# EAGLE board PCB (EAGLE 9.7.0)
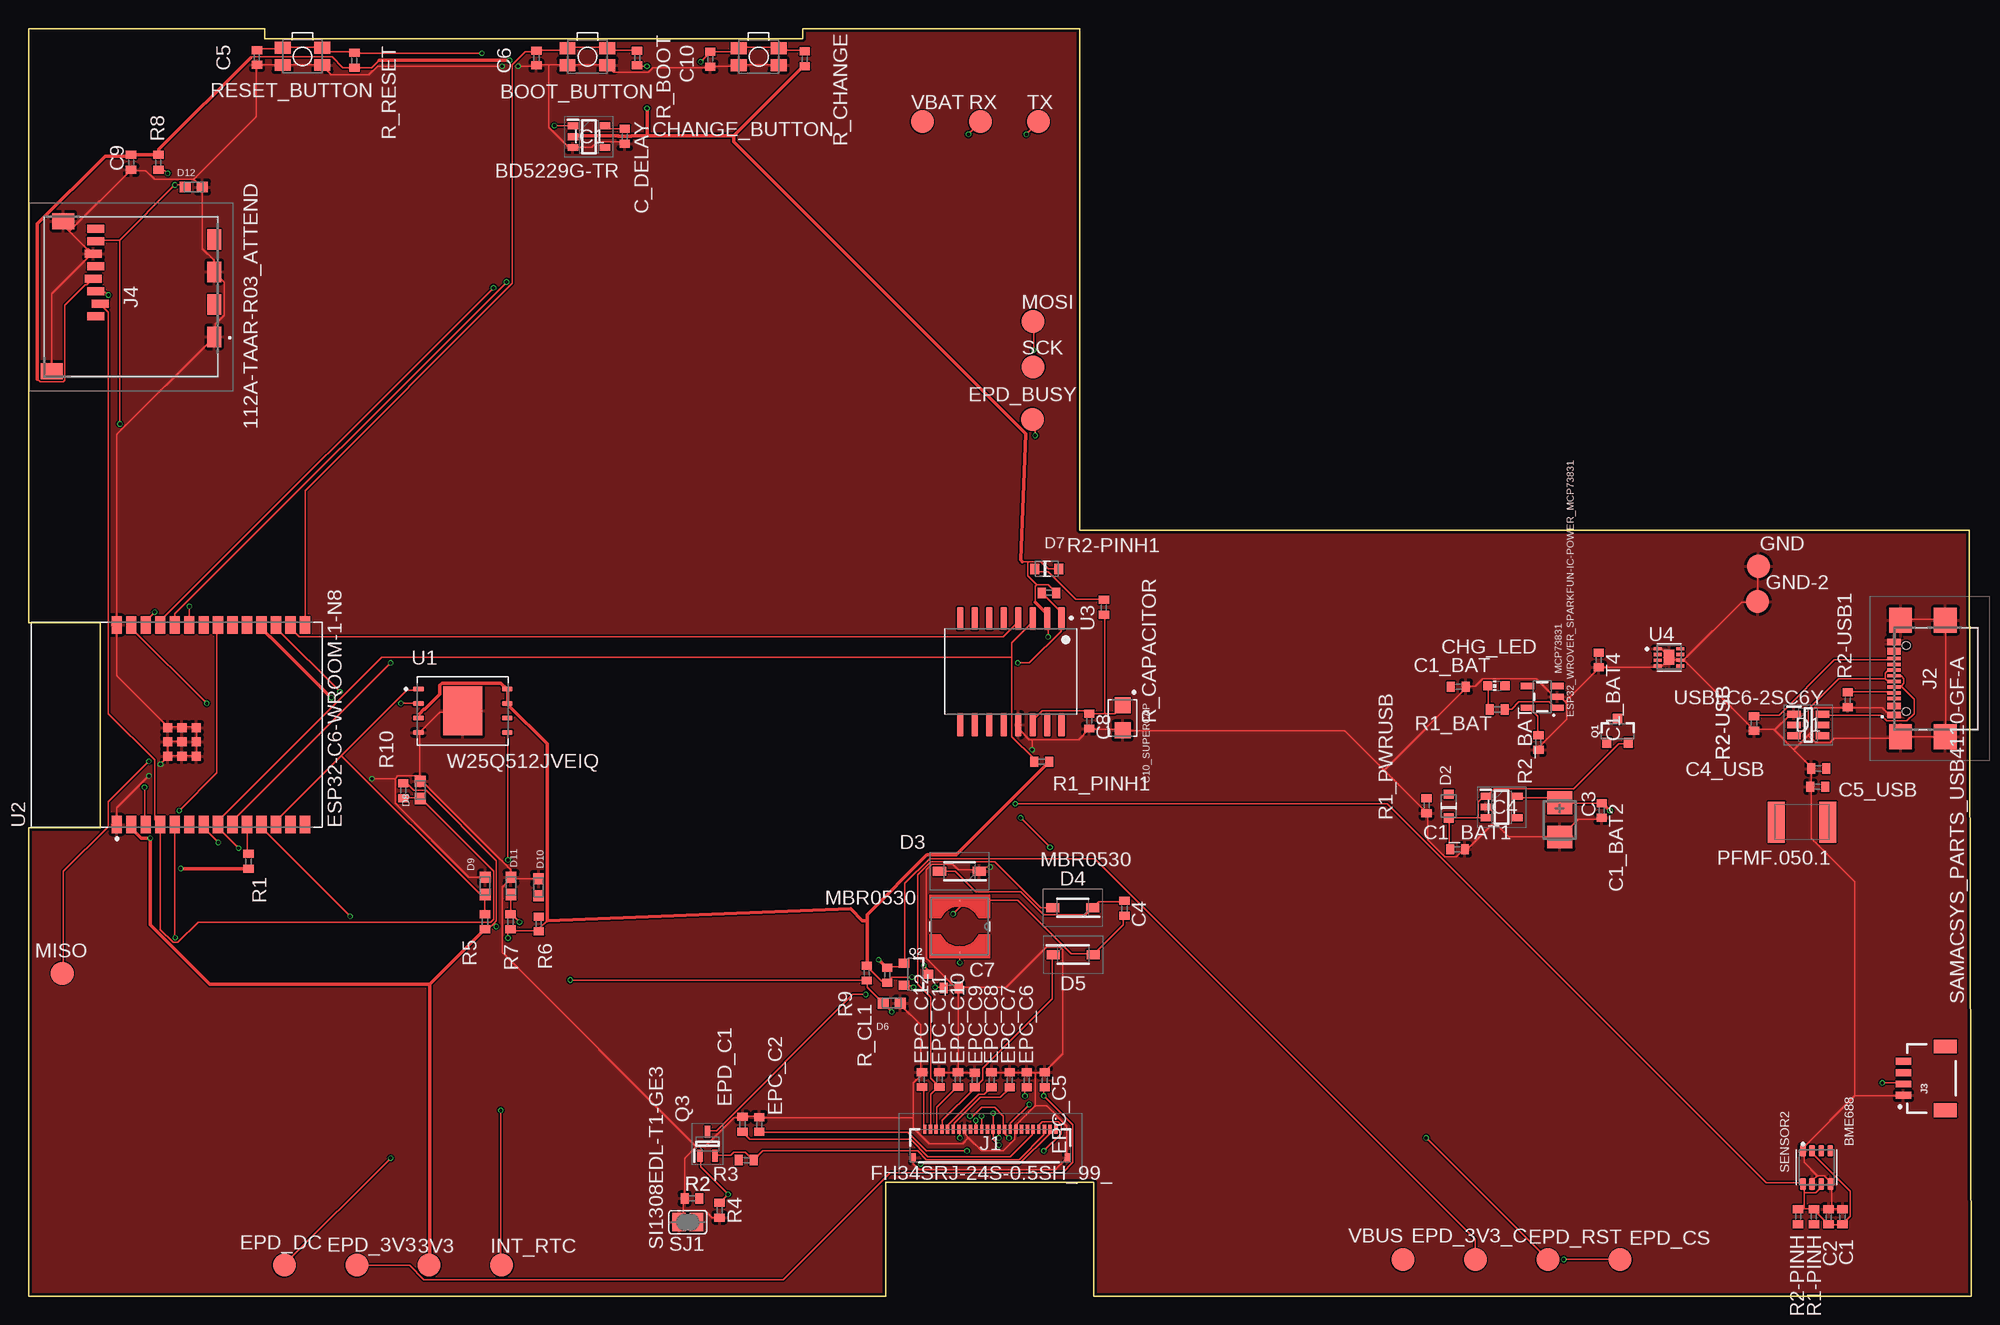
[diagram p0: board, top side]
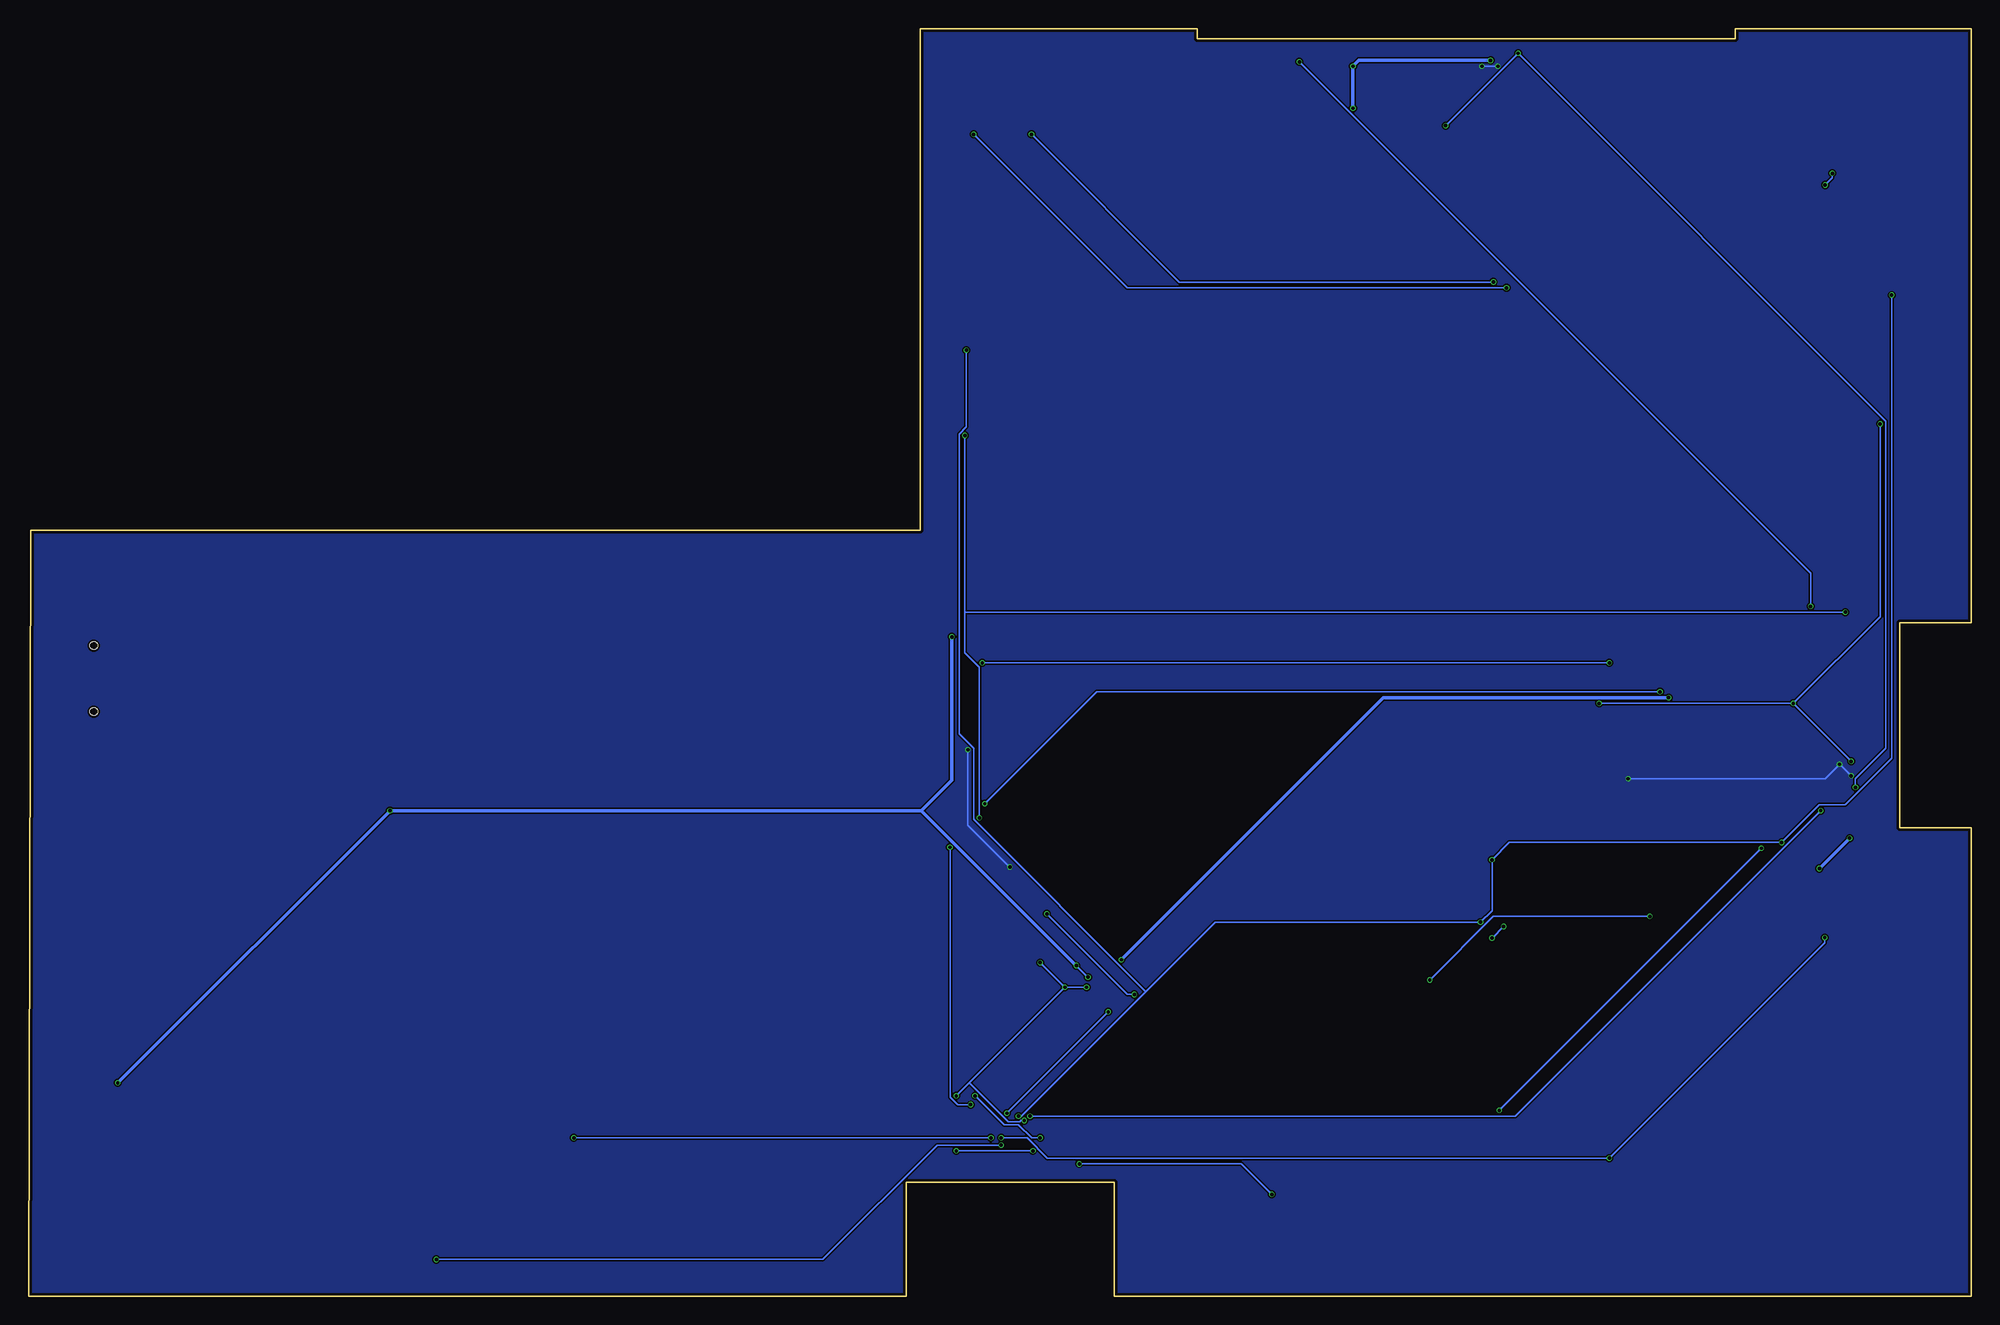
[diagram p1: board, bottom side, seen from below]

Size 170.4 x 111.2 mm. Coordinates in mm from the lower left corner, seen from the top.
Outline: 0,41.1 0,0 75.2,0 75.2,10 93.4,10 93.4,0 170.4,0 170.2,67.2 92.2,67.2 92.2,111.2 67.9,111.2 67.9,110.3 20.7,110.3 20.7,111.2 0,111.2 0,59.1 6.3,59.1 6.3,41.1 0,41.1
Copper layers (1*16): Top 0.035mm / dielectric 1.6mm / Bottom 0.035mm
Design rules "jlcpcb-2layers.edru": minimum track width 5mil, minimum drill 0.3mm, track to track 5mil, track to pad 5mil, pad to pad 5mil, via to via 5mil, smd to smd 5mil, copper to edge 0.2mm, drill to drill 6mil, minimum pad ring 10mil, minimum via ring 3mil, stop-mask expansion 4mil, vias tented up to drill 0mil, thermal gap 10mil

## Footprints (pad centres in the part's own frame; a part is rotated, then mirrored left to right if it is on the bottom)
TP20R = smd 2 x 2: TP 0,0
MYBUTTON = smd 1.4 x 1.05: 1 1.75,0.75; 2 -1.75,0.75; 3 -1.75,-0.75; 4 1.75,-0.75
EAGLE-LTSPICE_C0402 = smd 0.7 x 0.9: 1 -0.65,0; 2 0.65,0
RCL_CT3528 = smd 2 x 2.2: + -1.5,0; - 1.5,0
CAPCP3225X100N = smd 1.4 x 1.4: 1 -1.1,0; 2 1.1,0
ADAFRUIT_CHIP-LED0603 = smd 0.8 x 0.8: A 0,-0.75; C 0,0.75
SOT95P280X145-6N = smd 1.2 x 0.6: 1 -1.25,0.95; 2 -1.25,0; 3 -1.25,-0.95; 4 1.25,-0.95; 5 1.25,0; 6 1.25,0.95
ESP32_WROVER_AVX---SD0805S020S1R0_AVX_SD0805S020S1R0_0 = smd 0.8 x 0.9: 1 -1.05,0; 2 1.05,0
SOD3716X135N = smd 1.15 x 0.8: 1 -1.75,0; 2 1.75,0
DIOC1608X36N = smd 0.97 x 0.94: 1 -0.75,0; 2 0.75,0
ESP32_WROVER_EAGLE-LTSPICE_C0402 = smd 0.7 x 0.9: 1 -0.65,0; 2 0.65,0
SOT95P280X125-5N = smd 0.9 x 0.6: 1 -1.4,0.95; 2 -1.4,0; 3 -1.4,-0.95; 4 1.4,-0.95; 5 1.4,0.95
SOT95P280X120-5N = smd 0.9 x 0.6: 1 -1.4,0.95; 2 -1.4,0; 3 -1.4,-0.95; 4 1.4,-0.95; 5 1.4,0.95
FH34SRJ24S05SH99 = smd 0.3 x 0.8: 1 5.75,1.45; 2 5.25,1.45; 3 4.75,1.45; 4 4.25,1.45; 5 3.75,1.45; 6 3.25,1.45; 7 2.75,1.45; 8 2.25,1.45; 9 1.75,1.45; 10 1.25,1.45; 11 0.75,1.45; 12 0.25,1.45; 13 -0.25,1.45; 14 -0.75,1.45; 15 -1.25,1.45; 16 -1.75,1.45; 17 -2.25,1.45; 18 -2.75,1.45; 19 -3.25,1.45; 20 -3.75,1.45; 21 -4.25,1.45; 22 -4.75,1.45; 23 -5.25,1.45; 24 -5.75,1.45 | smd 0.4 x 0.8: MP1 6.75,-1.05; MP2 -6.75,-1.05
SAMACSYS_PARTS_USB4110GFA = smd 0.3 x 1.15: A1 -3.35,3.678; A4 -2.55,3.678; A5 -1.25,3.678; A6 -0.25,3.678; A7 0.25,3.678; A8 1.25,3.678; A9 2.55,3.678; A12 3.35,3.678; B1 3.05,3.678; B4 2.25,3.678; B5 1.75,3.678; B6 0.75,3.678; B7 -0.75,3.678; B8 -1.75,3.678; B9 -2.25,3.678; B12 -3.05,3.678 | smd 2.18 x 2: MP1 -5.11,-0.827; MP2 5.11,-0.827; MP3 -5.11,3.103; MP4 5.11,3.103 | hole 0.65: -2.89,2.603; 2.89,2.603
JST04_1MM_RA = smd 0.6 x 1.35: 1 -1.5,0; 2 -0.5,0; 3 0.5,0; 4 1.5,0 | smd 1.2 x 2: NC1 2.8,-3.675; NC2 -2.8,-3.675
112ATAARR03ATTEND = smd 1.8 x 1.2: G1 10.6,10.4; G2 4.9,10.4; S1 7.75,10.4; S2 2.05,10.4 | smd 1.4 x 1.9: G3 13.6,-3.85; G4 0.45,-2.85 | smd 0.7 x 1.5: P1 8.8,0; P2 7.7,0.4; P3 6.6,0; P4 5.5,-0.2; P5 4.4,0; P6 3.3,-0.2; P7 2.2,0; P8 1.1,0
IND_4828-WE-TPC_WRE = smd 0.127 x 0.127: 1 -2.286,0; 2 2.286,0
ESP32_WROVER_SPARKFUN-IC-POWER_SOT23-5 = smd 0.55 x 1.2: 1 -0.95,-1.3; 2 0,-1.3; 3 0.95,-1.3; 4 0.95,1.3; 5 -0.95,1.3
ESP32C6_VARISTOR_CT/CN1812 = smd 1.5 x 3.6: 1 -2.25,0; 2 2.25,0
ESP32_WROVER_SPARKFUN-DISCRETESEMI_SOT23-3 = smd 0.8 x 0.9: 1 -0.95,-1; 2 0.95,-1; 3 0,1.1
SOT65P210X110-3N = smd 1.05 x 0.5: 1 -1.05,0.65; 2 -1.05,-0.65; 3 1.05,0
ESP32_WROVER_EAGLE-LTSPICE_R0402 = smd 0.7 x 0.9: 1 -0.65,0; 2 0.65,0
ESP32_WROVER_BME680_PSON80P300X300X100-8N = smd 1.016 x 0.5: 1 1.458,1.2; 2 1.458,0.4; 3 1.458,-0.4; 4 1.458,-1.2; 5 -1.458,-1.22; 6 -1.458,-0.4; 7 -1.458,0.4; 8 -1.458,1.2
SJ = smd 1.168 x 1.6: 1 -0.762,0; 2 0.762,0
SON127P600X800X80-9N = smd 0.94 x 0.44: 1 -3.895,1.905; 2 -3.895,0.635; 3 -3.895,-0.635; 4 -3.895,-1.905; 5 3.895,-1.905; 6 3.895,-0.635; 7 3.895,0.635; 8 3.895,1.905 | smd 3.4 x 4.3: 9 0,0
XCVR_ESP32-C6-WROOM-1-N8 = smd 1.5 x 0.9: 1 -8.75,5.26; 2 -8.75,3.99; 3 -8.75,2.72; 4 -8.75,1.45; 5 -8.75,0.18; 6 -8.75,-1.09; 7 -8.75,-2.36; 8 -8.75,-3.63; 9 -8.75,-4.9; 10 -8.75,-6.17; 11 -8.75,-7.44; 12 -8.75,-8.71; 13 -8.75,-9.98; 14 -8.75,-11.25; 15 8.75,-11.25; 16 8.75,-9.98; 17 8.75,-8.71; 18 8.75,-7.44; 19 8.75,-6.17; 20 8.75,-4.9; 21 8.75,-3.63; 22 8.75,-2.36; 23 8.75,-1.09; 24 8.75,0.18; 25 8.75,1.45; 26 8.75,2.72; 27 8.75,3.99; 28 8.75,5.26 | smd 0.8 x 0.8: 29_1 -2.755,0.79; 29_2 -1.505,0.79; 29_3 -0.255,0.79; 29_4 -2.755,-0.46; 29_5 -1.505,-0.46; 29_6 -0.255,-0.46; 29_7 -2.755,-1.71; 29_8 -1.505,-1.71; 29_9 -0.255,-1.71
SOIC127P1032X265-16N = smd 2.05 x 0.59: 1 -4.655,4.445; 2 -4.655,3.175; 3 -4.655,1.905; 4 -4.655,0.635; 5 -4.655,-0.635; 6 -4.655,-1.905; 7 -4.655,-3.175; 8 -4.655,-4.445; 9 4.655,-4.445; 10 4.655,-3.175; 11 4.655,-1.905; 12 4.655,-0.635; 13 4.655,0.635; 14 4.655,1.905; 15 4.655,3.175; 16 4.655,4.445
SON50P200X200X80-9N = smd 0.76 x 0.27: 1 -0.985,0.75; 2 -0.985,0.25; 3 -0.985,-0.25; 4 -0.985,-0.75; 5 0.985,-0.75; 6 0.985,-0.25; 7 0.985,0.25; 8 0.985,0.75 | smd 0.9 x 1.3: 9 0,0

## Placement (x,y rotation side)
3V3  TPTP20R  [TP20R]  35.14,2.74 0 top
BOOT_BUTTON  BUTTON_CUSYOMV1  [MYBUTTON]  49.02,108.73 180 top
C1  100nF  [EAGLE-LTSPICE_C0402]  159.09,6.98 90 top
C1_BAT  4.7uF  [EAGLE-LTSPICE_C0402]  125.4,53.48 0 top
C1_BAT1  4.7uF  [EAGLE-LTSPICE_C0402]  125.33,39.22 0 top
C1_BAT2  4.7uF  [EAGLE-LTSPICE_C0402]  137.97,42.62 270 top
C1_BAT4  4.7uF  [EAGLE-LTSPICE_C0402]  137.71,55.82 270 top
C2  100nF  [EAGLE-LTSPICE_C0402]  157.87,6.98 90 top
C3  100uF  [RCL_CT3528]  134.29,41.8 270 top
C4  4.7uF/25V  [EAGLE-LTSPICE_C0402]  96.12,34.04 270 top
C4_USB  100nF  [EAGLE-LTSPICE_C0402]  157,46.3 180 top
C5  1uF  [EAGLE-LTSPICE_C0402]  20.03,108.66 270 top
C5_USB  4.7uF  [EAGLE-LTSPICE_C0402]  156.91,44.7 180 top
C6  100nF  [EAGLE-LTSPICE_C0402]  44.55,108.61 270 top
C7  10uF  [EAGLE-LTSPICE_C0402]  80.93,27.06 0 top
C8  100nF  [EAGLE-LTSPICE_C0402]  93.02,50.46 270 top
C9  100nF  [EAGLE-LTSPICE_C0402]  9,99.46 270 top
C10  100nF  [EAGLE-LTSPICE_C0402]  59.78,108.51 270 top
C10_SUPERCAP  CPH3225A  [CAPCP3225X100N]  95.95,50.74 270 top
C_DELAY  100nF  [EAGLE-LTSPICE_C0402]  52.3,101.74 270 top
CHANGE_BUTTON  BUTTON_CUSYOMV1  [MYBUTTON]  64.04,108.73 180 top
CHG_LED  [ADAFRUIT_CHIP-LED0603]  128.74,53.55 90 top
D1  USBLC6-2SC6Y  [SOT95P280X145-6N]  156.08,50.12 0 top
D2  ESP32_WROVER_AVX---SD0805S020S1R0_AVX_SD0805S020S1R0_0_0AVX_SD0805S020S1R0_0_0  [ESP32_WROVER_AVX---SD0805S020S1R0_AVX_SD0805S020S1R0_0]  124.55,43.01 90 top
D3  MBR0530  [SOD3716X135N]  81.64,37.3 180 top
D4  MBR0530  [SOD3716X135N]  91.58,34.1 180 top
D5  MBR0530  [SOD3716X135N]  91.62,29.98 0 top
D6  PGB1010603MR  [DIOC1608X36N]  75.71,25.72 0 top
D7  SD0805S020S1R0  [ESP32_WROVER_AVX---SD0805S020S1R0_AVX_SD0805S020S1R0_0]  89.3,63.81 0 top
D8  PGB1010603MR  [DIOC1608X36N]  34.36,44.42 90 top
D9  PGB1010603MR  [DIOC1608X36N]  40.05,36 90 top
D10  PGB1010603MR  [DIOC1608X36N]  44.73,35.9 90 top
D11  PGB1010603MR  [DIOC1608X36N]  42.31,36 90 top
D12  PGB1010603MR  [DIOC1608X36N]  14.49,97.3 0 top
EPC_C2  1uF/50V  [ESP32_WROVER_EAGLE-LTSPICE_C0402]  62.62,15.1 270 top
EPC_C5  1uF/50V  [ESP32_WROVER_EAGLE-LTSPICE_C0402]  89.13,19 270 top
EPC_C6  1uF/50V  [ESP32_WROVER_EAGLE-LTSPICE_C0402]  87.54,19 270 top
EPC_C7  1uF/50V  [ESP32_WROVER_EAGLE-LTSPICE_C0402]  86.05,19 270 top
EPC_C8  1uF/50V  [ESP32_WROVER_EAGLE-LTSPICE_C0402]  84.46,19 270 top
EPC_C9  1uF/50V  [ESP32_WROVER_EAGLE-LTSPICE_C0402]  82.98,18.98 270 top
EPC_C10  1uF/50V  [ESP32_WROVER_EAGLE-LTSPICE_C0402]  81.51,19.02 270 top
EPC_C11  1uF/50V  [ESP32_WROVER_EAGLE-LTSPICE_C0402]  79.89,19.02 270 top
EPC_C12  1uF/50V  [ESP32_WROVER_EAGLE-LTSPICE_C0402]  78.35,19.02 270 top
EPD_3V3  TPTP20R  [TP20R]  28.79,2.74 0 top
EPD_3V3_C  TPTP20R  [TP20R]  126.89,3.24 0 top
EPD_BUSY  TPTP20R  [TP20R]  88.03,76.92 0 top
EPD_C1  1uF/50V  [ESP32_WROVER_EAGLE-LTSPICE_C0402]  64.09,15.08 270 top
EPD_CS  TPTP20R  [TP20R]  139.59,3.24 0 top
EPD_DC  TPTP20R  [TP20R]  22.44,2.74 0 top
EPD_RST  TPTP20R  [TP20R]  133.24,3.24 0 top
GND  TPTP20R  [TP20R]  151.72,64.04 0 top
GND-2  TPTP20R  [TP20R]  151.64,60.94 0 top
IC1  BD5229G-TR  [SOT95P280X125-5N]  49.15,101.72 0 top
IC4  XC6220A331MR-G  [SOT95P280X120-5N]  129.19,42.92 0 top
INT_RTC  TPTP20R  [TP20R]  41.49,2.74 0 top
J1  FH34SRJ-24S-0.5SH_99_  [FH34SRJ24S05SH99]  84.35,13.22 0 top
J2  SAMACSYS_PARTS_USB4110-GF-A  [SAMACSYS_PARTS_USB4110GFA]  167.28,54.19 90 top
J3  QWIIC_RIGHT_ANGLE  [JST04_1MM_RA]  164.43,19.13 90 top
J4  112A-TAAR-R03_ATTEND  [112ATAARR03ATTEND]  5.89,94.75 270 top
L1  68uH  [IND_4828-WE-TPC_WRE]  81.67,32.45 270 top
MCP73831  ESP32_WROVER_SPARKFUN-IC-POWER_MCP73831  [ESP32_WROVER_SPARKFUN-IC-POWER_SOT23-5]  132.76,52.59 90 top
MISO  TPTP20R  [TP20R]  2.96,28.34 0 top
MOSI  TPTP20R  [TP20R]  88.09,85.52 0 top
PFMF.050.1  ESP32C6_VARISTORCN1812  [ESP32C6_VARISTOR_CT/CN1812]  155.54,41.6 180 top
Q1  20V/4.2A/52mΩ/1.4W  [ESP32_WROVER_SPARKFUN-DISCRETESEMI_SOT23-3]  139.36,49.56 0 top
Q2  20V/4.2A/52mΩ/1.4W  [ESP32_WROVER_SPARKFUN-DISCRETESEMI_SOT23-3]  77.78,28.26 270 top
Q3  SI1308EDL-T1-GE3  [SOT65P210X110-3N]  59.55,13.38 90 top
R1  10K  [ESP32_WROVER_EAGLE-LTSPICE_R0402]  19.29,38.16 270 top
R1-PINH  10K  [ESP32_WROVER_EAGLE-LTSPICE_R0402]  156.58,7 90 top
R1_BAT  200  [ESP32_WROVER_EAGLE-LTSPICE_R0402]  128.81,51.48 0 top
R1_PINH1  10K  [ESP32_WROVER_EAGLE-LTSPICE_R0402]  88.86,46.9 0 top
R1_PWRUSB  100K  [ESP32_WROVER_EAGLE-LTSPICE_R0402]  122.61,43.04 90 top
R2  2.2  [ESP32_WROVER_EAGLE-LTSPICE_R0402]  58.19,8.6 0 top
R2-PINH  10K  [ESP32_WROVER_EAGLE-LTSPICE_R0402]  155.19,7 90 top
R2-PINH1  10K  [ESP32_WROVER_EAGLE-LTSPICE_R0402]  89.5,61.7 0 top
R2-USB  5k1  [ESP32_WROVER_EAGLE-LTSPICE_R0402]  151.33,50.25 270 top
R2-USB1  5k1  [ESP32_WROVER_EAGLE-LTSPICE_R0402]  159.55,52.32 90 top
R2_BAT  2K  [ESP32_WROVER_EAGLE-LTSPICE_R0402]  132.42,48.58 90 top
R3  0.47  [ESP32_WROVER_EAGLE-LTSPICE_R0402]  62.95,11.96 0 top
R4  10K  [ESP32_WROVER_EAGLE-LTSPICE_R0402]  60.61,7.56 90 top
R5  10K  [ESP32_WROVER_EAGLE-LTSPICE_R0402]  40.03,32.86 270 top
R6  10K  [ESP32_WROVER_EAGLE-LTSPICE_R0402]  44.75,32.66 270 top
R7  10K  [ESP32_WROVER_EAGLE-LTSPICE_R0402]  42.27,32.86 270 top
R8  10K  [ESP32_WROVER_EAGLE-LTSPICE_R0402]  11.39,99.46 90 top
R9  10K  [ESP32_WROVER_EAGLE-LTSPICE_R0402]  73.51,28.36 90 top
R10  10K  [ESP32_WROVER_EAGLE-LTSPICE_R0402]  32.87,44.36 90 top
R_BOOT  10K  [ESP32_WROVER_EAGLE-LTSPICE_R0402]  53.37,108.61 90 top
R_CAPACITOR  15  [ESP32_WROVER_EAGLE-LTSPICE_R0402]  94.31,60.44 270 top
R_CHANGE  10K  [ESP32_WROVER_EAGLE-LTSPICE_R0402]  68.08,108.54 90 top
R_CL1  10K  [ESP32_WROVER_EAGLE-LTSPICE_R0402]  75.31,28.18 90 top
R_RESET  10K  [ESP32_WROVER_EAGLE-LTSPICE_R0402]  28.58,108.41 90 top
RESET_BUTTON  BUTTON_CUSYOMV1  [MYBUTTON]  24.03,108.75 180 top
RX  TPTP20R  [TP20R]  83.48,103.04 0 top
SCK  TPTP20R  [TP20R]  88.11,81.52 0 top
SENSOR2  BME688  [ESP32_WROVER_BME680_PSON80P300X300X100-8N]  156.82,11.32 90 top
SJ1  [SJ]  57.82,6.52 0 top
TX  TPTP20R  [TP20R]  88.56,103.04 0 top
U1  W25Q512JVEIQ  [SON127P600X800X80-9N]  38.09,51.36 0 top
U2  ESP32-C6-WROOM-1-N8  [XCVR_ESP32-C6-WROOM-1-N8]  13,50.14 90 top
U3  DS3231SN#  [SOIC127P1032X265-16N]  86.15,54.8 270 top
U4  MAX17048G+T10  [SON50P200X200X80-9N]  143.88,56.05 0 top
VBAT  TPTP20R  [TP20R]  78.4,103.04 0 top
VBUS  TPTP20R  [TP20R]  120.54,3.24 0 top

## Library data of the parts
3V3 BOOT_BUTTON CHANGE_BUTTON CHG_LED EPD_3V3 EPD_3V3_C EPD_BUSY EPD_CS EPD_DC EPD_RST GND GND-2 INT_RTC MISO MOSI PFMF.050.1 RESET_BUTTON RX SCK SJ1 TX VBAT VBUS = DeskAssistant v19 v1
C1 C1_BAT C1_BAT1 C1_BAT2 C1_BAT4 C2 C4 C4_USB C5 C5_USB C6-C10 C_DELAY EPC_C2 EPC_C5-EPC_C12 EPD_C1 = DeskAssistant v19 v1; SPICEMODEL: NONE; SPICEPREFIX: C
C3 = DeskAssistant v19 v1; SPICEPREFIX: C
C10_SUPERCAP = DeskAssistant v19 v1; AVAILABILITY: Not in stock; CHECK_PRICES: https://www.snapeda.com/parts/CPH3225A/Seiko+Instruments/view-part/?ref=eda; DESCRIPTION: 11 mF (EDLC) Supercapacitor 3.3 V 1210 (3225 Metric) - -; MF: Seiko Instruments; MP: CPH3225A; PACKAGE: 1210 Seiko; PRICE: None; PURCHASE-URL: https://www.snapeda.com/api/url_track_click_mouser/?unipart_id=562593&manufacturer=Seiko Instruments&part_name=CPH3225A&search_term=None; SNAPEDA_LINK: https://www.snapeda.com/parts/CPH3225A/Seiko+Instruments/view-part/?ref=snap
D1 = DeskAssistant v19 v1; AVAILABILITY: In Stock; CHECK_PRICES: https://www.snapeda.com/parts/USBLC6-2SC6Y/STMicroelectronics/view-part/?ref=eda; DESCRIPTION: 17V Clamp 5A (8/20µs) Ipp Tvs Diode Surface Mount SOT-23-6; MF: STMicroelectronics; MP: USBLC6-2SC6Y; PACKAGE: SOT-23-6 STMicroelectronics; PRICE: None; SNAPEDA_LINK: https://www.snapeda.com/parts/USBLC6-2SC6Y/STMicroelectronics/view-part/?ref=snap
D2 D7 = DeskAssistant v19 v1; CENTROID_NOT_SPECIFIED: No; DATASHEET: http://datasheets.avx.com/schottky.pdf; DIGIKEY_DESCRIPTION: DIODE SCHOTTKY 20V 1A 0805; DIGIKEY_PART_NUMBER: 478-7800-1-ND; LEAD_FREE: yes; MF: AVX; MOUSER_PART_NUMBER: 581-SD0805S020S1R0; PACKAGE: 0805 (2012 metric); PREFIX: D; ROHS: yes; TEMPERATURE_RANGE_HIGH: +125°C; TEMPERATURE_RANGE_LOW: -55°C
D3-D5 = DeskAssistant v19 v1; AVAILABILITY: In Stock; CHECK_PRICES: https://www.snapeda.com/parts/MBR0530/Onsemi/view-part/?ref=eda; DESCRIPTION: Diode Schottky 30 V 500mA Surface Mount SOD-123; MF: ON Semiconductor; MP: MBR0530; PACKAGE: SOD-123-2 ON Semiconductor; PRICE: None; PURCHASE-URL: https://www.snapeda.com/api/url_track_click_mouser/?unipart_id=179458&manufacturer=ON Semiconductor&part_name=MBR0530&search_term=None; SNAPEDA_LINK: https://www.snapeda.com/parts/MBR0530/Onsemi/view-part/?ref=snap
D6 D8-D12 = DeskAssistant v19 v1; AVAILABILITY: In Stock; CHECK_PRICES: https://www.snapeda.com/parts/PGB1010603MR/Littelfuse/view-part/?ref=eda; DESCRIPTION: 150V (Typ) Clamp - Ipp Tvs Diode Surface Mount 0603 (1608 Metric); MF: Littelfuse Inc.; MP: PGB1010603MR; PACKAGE: 0603 Littelfuse Inc.; PRICE: None; PURCHASE-URL: https://www.snapeda.com/api/url_track_click_mouser/?unipart_id=5659453&manufacturer=Littelfuse Inc.&part_name=PGB1010603MR&search_term=None; SNAPEDA_LINK: https://www.snapeda.com/parts/PGB1010603MR/Littelfuse/view-part/?ref=snap
IC1 = DeskAssistant v19 v1; DESCRIPTION: Voltage Detector with Adjustable Delay Time: CMOS processes are utilized to develop high precision, low current consumption CMOS reset ICs that allow arbitrary setting of the delay time. The extensive lineup includes both Nch Open Drain and CMOS output types in a wide range of detection voltages (from 2.3V to 6.0V, in 0.1V steps), enabling selection of the ideal solution based on customer requirements. In addition, the entire series is of course both lead-free and RoHS-compliant.; HEIGHT: 1.25mm; MANUFACTURER_NAME: ROHM Semiconductor; MANUFACTURER_PART_NUMBER: BD5229G-TR; MOUSER_PART_NUMBER: 755-BD5229G-TR; MOUSER_PRICE-STOCK: https://www.mouser.co.uk/ProductDetail/ROHM-Semiconductor/BD5229G-TR?qs=4kLU8WoGk0vvnhrrYwdszw%3D%3D
IC4 = DeskAssistant v19 v1; DESCRIPTION: LDO Voltage Regulators; HEIGHT: 1.2mm; MANUFACTURER_NAME: Torex; MANUFACTURER_PART_NUMBER: XC6220A331MR-G; MOUSER_PART_NUMBER: 865-XC6220A331MR-G; MOUSER_PRICE-STOCK: https://www.mouser.co.uk/ProductDetail/Torex-Semiconductor/XC6220A331MR-G?qs=AsjdqWjXhJ8ZSWznL1J0gg%3D%3D
J1 = DeskAssistant v19 v1; DESCRIPTION: 24 Position FFC, FPC Connector Contacts, Top and Bottom 0.020" (0.50mm) Surface Mount, Right Angle; HEIGHT: 1.1mm; MANUFACTURER_NAME: Hirose; MANUFACTURER_PART_NUMBER: FH34SRJ-24S-0.5SH(99); MOUSER_PART_NUMBER: 798-FH34SRJ24S05SH99; MOUSER_PRICE-STOCK: https://www.mouser.co.uk/ProductDetail/Hirose-Connector/FH34SRJ-24S-0.5SH99?qs=vcbW%252B4%252BSTIpKBl5ap9J8Fw%3D%3D
J2 = DeskAssistant v19 v1; DESCRIPTION: CONN USB 2.0 TYPE-C R/A SMT; HEIGHT: 3.26mm; MANUFACTURER_NAME: GCT (GLOBAL CONNECTOR TECHNOLOGY); MANUFACTURER_PART_NUMBER: USB4110-GF-A; MOUSER_PART_NUMBER: 640-USB4110-GF-A; MOUSER_PRICE-STOCK: https://www.mouser.co.uk/ProductDetail/GCT/USB4110-GF-A?qs=KUoIvG%2F9IlYiZvIXQjyJeA%3D%3D
J3 = DeskAssistant v19 v1; PROD_ID: CONN-13694
J4 = DeskAssistant v19 v1; DESCRIPTION: Micro SD Card Socket, Push-Push Type, Top Mount, SMT, H=1.83mm, 10u; HEIGHT: 1.9mm; MANUFACTURER_NAME: ATTEND; MANUFACTURER_PART_NUMBER: 112A-TAAR-R03 ATTEND
L1 = DeskAssistant v19 v1; COPYRIGHT: Copyright (C) 2024 Ultra Librarian. All rights reserved.; MANUFACTURER_PART_NUMBER: 744043680; MFR_NAME: Wurth Electronics
MCP73831 = DeskAssistant v19 v1; PROD_ID: IC-09995
Q1 Q2 = DeskAssistant v19 v1; PROD_ID: TRAN-14388
Q3 = DeskAssistant v19 v1; AVAILABILITY: In Stock; CHECK_PRICES: https://www.snapeda.com/parts/SI1308EDL-T1-GE3/Vishay+Siliconix/view-part/?ref=eda; DESCRIPTION: Si1308EDL-T1-GE3 N-channel MOSFET Transistor, 1.5 A, 30 V, 3-Pin SC-70 | Siliconix / Vishay SI1308EDL-T1-GE3; MF: Vishay Siliconix; MP: SI1308EDL-T1-GE3; PACKAGE: SOT-323 Vishay Semiconductor; PRICE: None; PURCHASE-URL: https://www.snapeda.com/api/url_track_click_mouser/?unipart_id=274603&manufacturer=Vishay Siliconix&part_name=SI1308EDL-T1-GE3&search_term=None; SNAPEDA_LINK: https://www.snapeda.com/parts/SI1308EDL-T1-GE3/Vishay+Siliconix/view-part/?ref=snap
R1 R1-PINH R1_BAT R1_PINH1 R1_PWRUSB R2 R2-PINH R2-PINH1 R2-USB R2-USB1 R2_BAT R3-R10 R_BOOT R_CAPACITOR R_CHANGE R_CL1 R_RESET = DeskAssistant v19 v1; SPICEMODEL: NONE; SPICEPREFIX: R
SENSOR2 = DeskAssistant v19 v1; AVAILABILITY: Unavailable; DESCRIPTION: Integrated Environmental Unit; MF: Bosch Sensortec; MP: BME680; PACKAGE: LGA-8 Bosch Tools; PRICE: None
U1 = DeskAssistant v19 v1; AVAILABILITY: In Stock; CHECK_PRICES: https://www.snapeda.com/parts/W25Q512JVEIQ/Winbond+Electronics/view-part/?ref=eda; DESCRIPTION: FLASH - NOR Memory IC 512Mb (64M x 8) SPI - Quad I/O 133 MHz 8-WSON (8x6); MF: Winbond Electronics; MP: W25Q512JVEIQ; PACKAGE: Package; PRICE: None; SNAPEDA_LINK: https://www.snapeda.com/parts/W25Q512JVEIQ/Winbond+Electronics/view-part/?ref=snap
U2 = DeskAssistant v19 v1; AVAILABILITY: In Stock; CHECK_PRICES: https://www.snapeda.com/parts/ESP32-C6-WROOM-1-N8/Espressif+Systems/view-part/?ref=eda; DESCRIPTION: Multiprotocol Modules ESP32-C6 module, Wi-Fi 6 in 2.4 GHz band, Bluetooth 5, Zigbee 3.0 and Thread. ESP34-WROOM Compatible - ENGINEERING SAMPLE; MF: Espressif Systems; MP: ESP32-C6-WROOM-1-N8; PACKAGE: None; PRICE: None; SNAPEDA_LINK: https://www.snapeda.com/parts/ESP32-C6-WROOM-1-N8/Espressif+Systems/view-part/?ref=snap
U3 = DeskAssistant v19 v1; AVAILABILITY: In Stock; CHECK_PRICES: https://www.snapeda.com/parts/DS3231SN%23/Analog+Devices/view-part/?ref=eda; DESCRIPTION: Extremely Accurate I²C-Integrated RTC/TCXO/Crystal; MF: Analog Devices; MP: DS3231SN#; PACKAGE: SOIC-16 Maxim; PRICE: None; PURCHASE-URL: https://www.snapeda.com/api/url_track_click_mouser/?unipart_id=99048&manufacturer=Analog Devices&part_name=DS3231SN#&search_term=None; SNAPEDA_LINK: https://www.snapeda.com/parts/DS3231SN%23/Analog+Devices/view-part/?ref=snap
U4 = DeskAssistant v19 v1; AVAILABILITY: In Stock; CHECK_PRICES: https://www.snapeda.com/parts/MAX17048G+T10/Analog+Devices/view-part/?ref=eda; DESCRIPTION: 3µA 1-Cell/2-Cell Fuel Gauge with ModelGauge; MF: Analog Devices; MP: MAX17048G+T10; PACKAGE: TDFN-8 Maxim; PRICE: None; PURCHASE-URL: https://www.snapeda.com/api/url_track_click_mouser/?unipart_id=329239&manufacturer=Analog Devices&part_name=MAX17048G+T10&search_term=None; SNAPEDA_LINK: https://www.snapeda.com/parts/MAX17048G+T10/Analog+Devices/view-part/?ref=snap

## Nets
3V3: 3V3.TP C1_BAT2.1 C3.+ C9.1 D7.2 IC1.2 IC4.5 J3.2 J4.P4 Q2.3 R1.2 R1_PINH1.2 R2-PINH1.2 R5.2 R6.2 R7.2 R8.2 R9.2 R10.2 R_BOOT.1 R_CHANGE.1 R_CL1.1 R_RESET.1 U1.3 U1.7 U1.8 U2.2 U3.2
12C_PW: C1.1 C2.1 R1-PINH.2 R2-PINH.2 SENSOR2.2 SENSOR2.6 SENSOR2.8 U2.17
32KHZ: R2-PINH1.1 U2.9 U3.1
DN: D1.6 J2.A7 J2.B7
DP: D1.3 J2.A6 J2.B6
EPD_3V3: C7.1 EPC_C5.2 EPD_3V3.TP J1.15 J1.16 L1.2 Q2.2
EPD_3V3_C: EPD_3V3_C.TP Q2.1 R_CL1.2 U2.18
EPD_BUSY: EPD_BUSY.TP J1.9 U2.26
EPD_CS: D6.1 EPD_CS.TP J1.12 R9.1 U2.11
EPD_DC: EPD_DC.TP J1.11 U2.5
EPD_RST: EPD_RST.TP J1.10 U2.21
FLASH_CS: D9.1 R5.1 U1.1 U2.12
GDR: J1.2 Q3.1 R4.2
GND: BOOT_BUTTON.1 BOOT_BUTTON.2 C1.2 C1_BAT1.2 C1_BAT2.2 C1_BAT4.2 C1_BAT.2 C2.2 C3.- C4_USB.2 C5.2 C5_USB.2 C6.2 C7.2 C8.2 C9.2 C10.2 C10_SUPERCAP.2 C_DELAY.2 CHANGE_BUTTON.1 CHANGE_BUTTON.2 D1.1 D3.1 D6.2 D8.2 D9.2 D10.2 D11.2 D12.2 EPC_C2.1 EPC_C5.1 EPC_C6.1 EPC_C7.1 EPC_C8.1 EPC_C9.1 EPC_C10.1 EPC_C11.1 EPC_C12.1 EPD_C1.1 GND-2.TP GND.TP IC1.3 IC4.2 J1.8 J1.17 J1.MP1 J1.MP2 J2.A1 J2.A12 J2.B1 J2.B12 J2.MP1 J2.MP2 J2.MP3 J2.MP4 J3.1 J4.G1 J4.G2 J4.G3 J4.G4 J4.P6 MCP73831.2 R1_PWRUSB.1 R2-USB1.1 R2-USB.2 R2.1 R2_BAT.1 R4.1 RESET_BUTTON.1 RESET_BUTTON.2 SENSOR2.1 SENSOR2.5 SENSOR2.7 SJ1.1 U1.4 U1.9 U2.1 U2.28 U2.29_1 U2.29_2 U2.29_3 U2.29_4 U2.29_5 U2.29_6 U2.29_7 U2.29_8 U2.29_9 U3.13 U4.1 U4.4 U4.6 U4.9
GPIO8: R1.1 U2.10
INT_RTC: INT_RTC.TP R1_PINH1.1 U2.8 U3.3
IO/BOOT: BOOT_BUTTON.3 BOOT_BUTTON.4 C6.1 R_BOOT.2 U2.15
IO/CHANGE: C10.1 CHANGE_BUTTON.3 CHANGE_BUTTON.4 R_CHANGE.2 U2.23
MISO: D12.1 J4.P7 MISO.TP R8.1 U1.2 U2.27
MOSI: D11.1 J1.14 J4.P3 MOSI.TP R7.1 U1.5 U2.7
N$1: C1_BAT1.1 D2.1 IC4.1 IC4.3 Q1.2
N$2: J2.B5 R2-USB.1
N$3: J2.A5 R2-USB1.2
N$4: C_DELAY.1 IC1.5
N$5: C4.1 D3.2 D4.1
N$6: MCP73831.1 R1_BAT.2
N$7: CHG_LED.C R1_BAT.1
N$8: MCP73831.5 R2_BAT.2
N$9: EPC_C12.2 J1.24
N$10: D7.1 R_CAPACITOR.1
N$11: EPC_C10.2 J1.22
N$13: EPC_C8.2 J1.20
N$14: EPC_C7.2 J1.19
N$15: EPC_C6.2 J1.18
N$24: EPC_C2.2 J1.5
N$25: EPD_C1.2 J1.4
PREVGH: D5.1 EPC_C9.2 J1.21
PREVGL: D4.2 EPC_C11.2 J1.23
RESE: J1.3 Q3.2 R3.2
RESET: C5.1 IC1.1 R_RESET.2 RESET_BUTTON.3 RESET_BUTTON.4 U2.3
RTC_RST: U2.16 U3.4
RX: RX.TP U2.24
SRC: C4.2 D5.2 L1.1 Q3.3
SS_SD: D8.1 J4.P2 R10.1 U2.4
TX: TX.TP U2.25
VRTC: C8.1 C10_SUPERCAP.1 R_CAPACITOR.2 U3.14

## Tracks (layer width: path | path; a pad name or v marks a point on that pad's centre or on a via)
3V3  (via drill 0.3)
  Top 0.127: 9.03,100.14 C9.1 8.9,100.02 | 11.32,100.14 R8.2 11.44,100.14 11.44,100.52 | 0.77,80.46 1.03,80.2 3.06,80.2 3.19,80.33 3.19,86.94 4.97,88.71 5.09,88.71 5.6,89.22 J4.P4 | 88.41,62.42 89.42,62.42 90.06,61.79 R2-PINH1.2 | 88.41,62.42 88.28,62.3 88.28,60.9 | 89.29,59.88 89.29,59.5 U3.2 89.42,59.38 v89.42,57.85 | 87.77,64.46 88.79,64.46 89.42,63.82 90.31,63.82 D7.2 | 87.77,64.46 87.64,64.33 87.64,63.19 88.41,62.42 | 47.77,101.79 IC1.2 | 67.96,107.89 R_CHANGE.1 | v54.24,107.89 53.48,107.89 R_BOOT.1 | 87.14,64.46 87.77,64.46 | 30.75,108.4 30.11,107.76 R_RESET.1 28.46,107.76 27.57,107.76 26.62,108.71 19.54,108.71 19.48,108.65 | 9.03,41.09 9.03,41.34 U2.2 | 19.19,37.53 R1.2 | 40.78,32.71 40.4,32.32 40.15,32.32 R5.2 | 40.78,32.71 41.03,32.96 41.03,38.22 34.86,44.39 33.8,44.39 33.29,44.9 32.91,44.9 R10.2 | 35.19,2.86 3V3.TP | IC4.5 130.7,43.75 133.87,43.75 134.25,43.37 C3.+ 134.38,43.25 137.94,43.25 C1_BAT2.1 138.06,43.25 | v162.57,18.74 164.35,18.74 J3.2 | 34.3,51.12 34.3,50.74 U1.3 | 41.92,53.28 U1.8 42.05,53.15 | 42.05,52.01 U1.7 42.05,51.88 | 45.48,32.96 44.84,32.32 44.84,32.07 R6.2 44.72,32.07 42.43,32.07 42.3,32.2 R7.2 42.18,32.2 42.05,32.07 v42.05,31.44 | Q2.3 78.88,28.64 v78.5,29.02 | v77.48,28.01 75.7,28.01 75.32,27.63 R_CL1.1 75.2,27.63 74.82,27.63 73.55,28.9 R9.2 73.55,29.02 | 89.42,46.8 R1_PINH1.2 | v41.03,32.45 40.78,32.71
  Top 0.3: 11.32,100.14 9.03,100.14 | 8.9,100.02 6.72,100.02 0.77,94.08 0.77,80.46 | 61.86,101.79 54.24,101.79 | 67.96,107.89 61.86,101.79 | 54.24,101.79 v54.24,104.21 | 87.14,64.46 87,64.6 87.47,75.67 61.86,101.28 61.86,101.79 | v42.18,108.4 30.75,108.4 | v13.35,37.53 19.19,37.53 | 35.19,27.37 35.19,2.86 | R5.2 35.19,27.37 | 35.19,27.37 15.89,27.37 10.68,32.58 v10.68,40.2 9.88,40.2 9.03,41.05 9.03,41.09 | 138.06,43.25 v138.7,42.61 | 41.92,53.28 41.41,53.79 36.28,53.79 36.08,53.59 36.08,52.83 34.75,51.5 34.68,51.5 34.3,51.12 | 42.05,53.15 42.05,52.01 | 42.05,51.88 45.48,48.45 45.48,32.96 72.1,34 73.14,32.96 73.55,32.96 | 73.55,29.02 73.55,32.96 | 73.55,32.96 73.55,33.47 78.75,38.67 78.82,38.74 81.36,38.74 89.42,46.8 | 11.44,100.52 11.44,100.62 19.48,108.65 | 54.24,101.79 52.9,101.79 52.87,101.76 51.73,101.76 51.7,101.79 47.77,101.79 | 88.28,60.9 88.42,60.76 89.29,59.88
  Bottom 0.127: v77.48,28.01 v78.5,29.02 | v42.05,31.44 v41.03,32.45
  Bottom 0.3: v54.24,104.21 v54.24,107.89 53.73,108.4 v42.18,108.4 | v10.68,40.2 v13.35,37.53 | v162.57,18.74 v138.7,42.61 92.09,42.61 | v78.5,29.02 92.09,42.61 | v89.42,57.85 89.42,45.28 92.09,42.61
12C_PW  (via drill 0.3)
  Top 0.127: SENSOR2.2 156.48,12.77 156.48,12.51 159.78,9.21 159.78,7.05 159.14,6.42 C1.1 159.02,6.29 157.87,6.29 C2.1 157.75,6.42 156.6,7.56 R1-PINH.2 156.48,7.69 155.72,7.69 | 155.72,7.69 155.21,7.69 R2-PINH.2 | 155.72,7.69 155.72,9.08 | 155.72,9.08 155.72,9.85 SENSOR2.8 155.59,9.97 152.41,9.97 119.18,43.21 v86.54,43.21 | 155.72,9.08 156.73,9.08 157.11,9.46 157.11,9.85 SENSOR2.6 | v27.32,53.03 21.73,58.61 21.73,58.87 U2.17
  Bottom 0.127: v27.32,53.03 76.72,53.03 v86.54,43.21
32KHZ  (via drill 0.3)
  Top 0.127: R2-PINH1.1 88.91,61.66 90.56,60.01 90.56,59.5 U3.1 90.56,59.38 90.56,58.36 87.77,55.57 v86.75,55.57 | v31.76,55.57 17.92,41.72 17.92,41.47 U2.9
  Bottom 0.127: v86.75,55.57 v31.76,55.57
DN
  Top 0.127: 164.22,53.53 163.72,53.53 J2.B7 | 164.22,53.53 164.48,53.79 164.48,54.17 164.22,54.42 163.72,54.42 J2.A7 | 164.22,53.53 165.37,52.39 165.37,51.12 164.73,50.49 162.95,50.49 162.45,50.99 157.37,50.99 D1.6
DP
  Top 0.127: 162.83,54.17 162.95,54.04 163.59,54.04 J2.A6 | 162.83,54.17 162.83,54.68 163.08,54.93 J2.B6 | 162.83,54.17 158.76,54.17 156.1,51.5 156.1,50.1 155.21,49.22 154.95,49.22 D1.3
EPD_3V3  (via drill 0.3)
  Top 0.127: 83.07,14.67 82.69,14.67 J1.16 | v77.61,27.12 77.48,27.24 76.85,27.24 Q2.2 | v79.52,27.12 80.28,27.12 C7.1 | EPC_C5.2 89.04,18.23 v89.04,17.59 91.58,15.05 91.58,11.75 90.69,10.86 75.58,10.86 66.18,1.46 34.68,1.46 33.41,2.73 28.84,2.73 EPD_3V3.TP | v83.07,15.43 83.07,14.67 | 83.07,14.67 J1.15 | v81.67,29.28 L1.2
  Bottom 0.127: v79.52,27.12 v77.61,27.12 | v79.52,27.12 87.9,18.74 | 87.9,18.74 v89.04,17.59 | v83.07,15.43 83.32,15.43 83.45,15.31 84.47,15.31 87.9,18.74 | v79.52,27.12 v81.67,29.28
EPD_3V3_C  (via drill 0.3)
  Top 0.127: 20.46,58.61 20.46,58.87 U2.18 | 75.2,28.9 R_CL1.2 75.32,28.9 76.47,28.9 76.72,29.15 Q2.1 76.85,29.28 76.85,36.22 79.03,38.4 93.51,38.4 126.89,5.02 EPD_3V3_C.TP
  Top 0.3: 75.2,28.9 v74.56,29.53 | v26.56,52.52 21.21,57.86 21.15,57.86 20.46,58.55 20.46,58.61
  Bottom 0.3: v26.56,52.52 51.58,52.52 v74.56,29.53
EPD_BUSY  (via drill 0.3)
  Top 0.127: v87.77,16.83 86.12,15.18 86.12,14.67 J1.9 | v88.28,75.51 88.28,76.78 88.15,76.9 EPD_BUSY.TP | v11.06,60.01 10.3,59.25 10.3,58.99 U2.26 | v87.01,41.98 v89.59,39.4
  Bottom 0.127: v87.77,16.83 88.91,16.83 89.55,17.47 89.55,39.36 v89.59,39.4 | v87.01,41.98 87.01,55.18 88.28,56.45 88.28,60.01 | v88.28,75.51 88.28,60.01 | 88.28,60.01 v11.06,60.01
EPD_CS  (via drill 0.3)
  Top 0.127: v84.59,16.07 J1.12 84.59,14.54 84.59,13.78 v85.1,13.28 | v75.7,24.96 75.07,25.59 D6.1 74.94,25.72 73.55,27.12 73.55,27.63 R9.1 73.42,27.75 v47.51,27.75 | v28.21,33.34 20.46,41.09 20.46,41.34 U2.11 | v134.63,3.24 EPD_CS.TP
  Bottom 0.127: v75.7,24.96 v84.59,16.07 | v28.21,33.34 41.92,33.34 v47.51,27.75 | v134.63,3.24 100.72,3.24 90.69,13.28 v85.1,13.28
EPD_DC  (via drill 0.3)
  Top 0.127: v85.1,13.91 85.1,14.54 J1.11 | v31.76,12.13 22.49,2.86 EPD_DC.TP | U2.5 12.84,41.37 12.84,31.49 v12.87,31.46
  Bottom 0.127: v85.1,13.91 82.82,13.91 81.04,12.13 v31.76,12.13 12.87,31.03 v12.87,31.46
EPD_RST  (via drill 0.3)
  Top 0.127: v85.99,13.91 85.61,14.29 85.61,14.54 J1.10 85.48,14.67 85.48,15.81 84.72,16.58 83.58,16.58 82.82,15.81 v82.56,15.81 | v122.57,13.91 EPD_RST.TP | v13.22,42.61 16.52,45.91 16.52,58.87 U2.21
  Bottom 0.127: v122.57,13.91 v85.99,13.91 | v13.22,42.61 40.02,15.81 v82.56,15.81
FLASH_CS
  Top 0.127: R5.1 40.02,33.59 40.02,35.25 D9.1 40.02,35.37 39.51,35.37 27.45,47.44 | 27.45,47.44 21.73,41.72 21.73,41.47 U2.12 | 27.45,47.44 33.16,53.15 34.18,53.15 U1.1
GDR  (via drill 0.3)
  Top 0.127: v78.24,11.62 86.88,11.62 89.55,14.29 89.55,14.54 J1.2 | R4.2 60.72,8.32 v61.35,8.96 58.94,11.37 58.94,12.26 Q3.1
  Bottom 0.127: v78.24,11.62 64.02,11.62 v61.35,8.96
GND  (via drill 0.3)
  Top 0.127: 88.02,48.84 92.09,48.84 92.98,49.72 C8.2 93.1,49.72 95.9,49.72 C10_SUPERCAP.2 96.02,49.6 115.46,49.6 118.88,46.17 | 88.02,48.84 87.77,48.84 86.88,49.72 86.88,50.1 U3.13 | C1_BAT2.2 137.94,41.85 135.9,41.85 134.38,40.33 C3.- 134.25,40.33 129.81,40.33 128.54,41.6 | 128.54,41.6 126.25,39.31 126,39.31 C1_BAT1.2 125.87,39.18 125.23,38.55 124.22,38.55 122.69,40.07 122.69,42.36 R1_PWRUSB.1 122.57,42.48 118.88,46.17 | 128.54,41.6 128.54,42.36 127.9,42.99 IC4.2 | GND.TP 151.65,63.95 151.65,61.03 GND-2.TP 151.52,60.9 150.25,60.9 145.17,55.82 | 143.78,55.82 143.9,55.95 U4.9 | 143.78,55.82 143.27,55.31 143.01,55.31 U4.4 142.89,55.18 137.81,55.18 C1_BAT4.2 137.68,55.06 134.76,52.14 | 143.78,55.82 144.79,55.82 U4.6 | 143.78,55.82 U4.9 | U4.1 143.01,56.71 143.27,56.71 143.9,56.07 U4.9 | 134.76,52.14 134.38,52.52 134.12,52.52 MCP73831.2 134,52.64 133.74,52.64 132.22,54.17 127.52,54.17 126.89,53.53 126.12,53.53 C1_BAT.2 126.12,53.41 118.88,46.17 | 134.76,52.14 134.89,52.01 134.89,50.61 132.47,48.2 132.47,47.95 R2_BAT.1 | 145.17,55.82 144.92,55.82 U4.6 | 158.13,7.69 159.02,7.69 C1.2 | 158.13,7.69 157.87,7.69 C2.2 158.13,7.69 | 156.86,10.61 156.48,10.23 156.48,9.97 SENSOR2.7 | 156.86,10.61 157.49,10.61 158.13,9.97 SENSOR2.5 158.13,9.85 158.13,7.69 | 156.86,10.61 155.72,11.75 155.72,12.77 SENSOR2.1 155.72,12.89 155.72,13.15 160.16,17.59 | 160.16,17.59 164.35,17.59 J3.1 | J2.B1 163.59,57.34 163.59,57.47 J2.A12 163.72,57.6 163.72,58.87 164.1,59.25 J2.MP4 164.22,59.38 168.03,59.38 J2.MP2 168.16,59.25 168.16,49.09 J2.MP1 168.03,49.09 164.22,49.09 J2.MP3 164.1,48.96 158.38,48.96 158,48.58 156.73,48.58 156.1,49.22
  Top 0.127: J2.A1 163.59,50.87 163.59,51.12 J2.B12 163.59,51.25 162.95,51.25 162.57,51.63 159.65,51.63 R2-USB1.1 159.53,51.63 156.6,51.63 156.35,51.38 156.35,49.47 156.1,49.22 | 153.05,49.72 153.17,49.72 154.44,50.99 154.83,50.99 D1.1 | 153.05,49.72 151.4,49.72 R2-USB.2 151.27,49.72 145.17,55.82 | 153.05,49.72 154.83,47.95 | 154.83,47.95 156.35,46.42 C4_USB.2 156.35,44.77 C5_USB.2 156.35,44.64 156.35,40.2 160.16,36.39 160.16,17.59 | 154.83,47.95 156.1,49.22 | 145.17,55.82 U4.6 | D10.2 44.72,36.64 42.43,36.64 D11.2 | 34.3,45.66 34.3,45.28 D8.2 34.43,45.28 42.3,37.41 42.3,36.77 D11.2 | 34.3,45.66 34.3,49.34 U1.4 34.3,49.47 36.08,51.25 37.99,51.25 U1.9 | 32.14,45.41 32.14,43.25 38.62,36.77 40.02,36.77 D9.2 | 32.14,45.41 32.4,45.66 34.3,45.66 | EPC_C9.1 82.94,19.62 81.55,19.62 EPC_C10.1 | EPC_C11.1 79.9,19.62 81.42,19.62 EPC_C10.1 | 81.55,26.86 81.55,19.75 EPC_C10.1 | 81.55,26.86 81.55,26.99 C7.2 | 81.55,26.86 78.75,29.66 78.75,37.41 79.24,37.89 81.06,37.89 81.55,37.41 83.32,37.41 D3.1 83.45,37.41 83.71,37.66 v84.34,37.66 | 81.55,26.86 C7.2 | 57.42,7.56 57.42,6.8 57.16,6.54 SJ1.1 | 57.42,7.56 57.42,8.58 R2.1 57.54,8.7 57.54,12.13 58.56,13.15 | 57.42,7.56 59.32,7.56 59.96,6.93 60.59,6.93 R4.1 | 58.56,13.15 59.32,13.15 61.86,15.69 62.5,15.69 EPC_C2.1 62.62,15.81 64.02,15.81 EPD_C1.1 64.15,15.69 77.61,15.69 | J1.MP2 77.61,12.13 77.61,11.62 78.12,11.12 90.06,11.12 91.07,12.13 J1.MP1 91.07,12.26 91.07,14.93 89.29,16.7 88.28,16.7 | D6.2 76.47,25.59 78.24,23.82 78.24,19.75 EPC_C12.1 78.24,19.62 78.24,19.37 77.61,18.74 77.61,15.69 | EPC_C8.1 84.47,19.62 85.99,19.62 EPC_C7.1 86.12,19.62 87.52,19.62 EPC_C6.1 87.64,19.62 88.28,19.62
  Top 0.127: 88.28,19.62 89.04,19.62 EPC_C5.1 89.17,19.75 90.69,21.28 90.69,30.42 90.44,30.67 89.29,30.67 85.74,27.12 81.67,27.12 C7.2 | 82.44,13.91 83.58,12.77 85.48,12.77 86.5,13.78 86.5,14.54 J1.8 86.63,14.67 86.63,15.05 88.28,16.7 | 82.44,13.91 82.18,14.16 82.18,14.54 J1.17 | 88.28,16.7 88.28,19.62 | 77.61,15.69 77.61,14.8 79.01,13.4 81.93,13.4 82.44,13.91 | 58.56,13.15 41.54,30.17 41.54,35.88 42.3,36.64 D11.2 | CHANGE_BUTTON.2 65.67,108.02 62.37,108.02 CHANGE_BUTTON.1 62.24,107.89 59.83,107.89 C10.2 59.7,107.76 54.75,107.76 54.37,107.38 51.32,107.38 50.81,107.89 BOOT_BUTTON.2 50.69,108.02 47.38,108.02 BOOT_BUTTON.1 47.26,108.02 45.61,108.02 | C_DELAY.2 52.21,101.16 52.08,101.29 49.92,101.29 49.42,100.78 47.77,100.78 IC1.3 47.64,100.78 47.38,100.78 45.61,102.56 45.61,108.02 | 45.61,108.02 44.59,108.02 C6.2 44.46,107.89 v42.94,107.89 | U2.29_1 12.33,47.44 13.35,47.44 U2.29_4 13.47,47.44 14.62,47.44 U2.29_7 14.74,47.44 14.74,48.58 U2.29_8 14.74,48.71 14.74,49.85 U2.29_9 14.62,49.98 13.47,49.98 U2.29_6 13.35,49.98 12.33,49.98 U2.29_3 12.21,49.98 7.76,54.42 7.76,58.87 U2.28 7.76,58.99 7.76,75.63 16.27,84.14 J4.G1 16.4,84.27 16.4,85.28 17.16,86.05 17.16,88.97 16.4,89.73 J4.G2 16.27,89.86 16.27,90.87 15.25,91.89 15.25,97.22 D12.2 15.13,97.35 14.49,97.98 | U2.29_5 13.35,48.71 12.33,48.71 U2.29_2 12.21,48.58 12.21,47.44 U2.29_1 | v10.55,45.66 7.76,42.87 7.76,41.47 U2.1 | v11.57,46.68 12.21,47.31 U2.29_1 | 5.6,91.51 5.22,91.89 5.09,91.89 3.57,93.41 | 3.57,93.41 3.06,93.92 3.06,94.17 J4.G4 | 5.6,91.51 2.05,87.95 2.05,81.22 J4.G3 | 5.6,91.51 J4.P6
  Top 0.127: 14.49,97.98 11.06,97.98 10.3,98.75 9.03,98.75 C9.2 8.9,98.75 3.57,93.41 | 14.49,97.98 19.95,103.45 19.95,107.89 C5.2 20.08,108.02 22.24,108.02 RESET_BUTTON.1 22.37,108.02 25.67,108.02 RESET_BUTTON.2 25.79,107.89 26.56,107.13 29.86,107.13 30.62,107.89 v41.54,107.89 | v30.11,45.41 32.14,45.41 | v88.02,47.95 88.02,48.84
  Bottom 0.127: v10.55,45.66 v11.57,46.68 12.84,45.41 v30.11,45.41 | v41.54,107.89 v42.94,107.89 | v88.02,47.95 88.02,41.34 v84.34,37.66
  pour Top: 93.56,9.94 93.58,9.92 93.58,-0.02 170.32,-0.02 170.32,67.12 92.28,67.12 92.26,67.14 92.24,67.16 92.22,67.18 92.22,111.12 67.98,111.12 67.98,110.28 67.96,110.26 67.94,110.24 67.92,110.22 20.68,110.22 20.66,110.24 20.64,110.26 20.62,110.28 20.62,111.12 0.08,111.12 0.08,59.18 6.32,59.18 6.34,59.16 6.36,59.14 6.38,59.12 6.38,41.08 6.36,41.06 6.34,41.04 6.32,41.02 0.08,41.02 0.08,0.08 75.12,0.08 75.12,10.02 75.14,10.04 75.16,10.06 75.18,10.08 93.42,10.08 93.44,10.06 93.46,10.04 93.48,10.02 93.48,9.98 93.52,9.98 93.54,9.96
  pour Bottom: 93.56,10.14 93.58,10.12 93.58,-0.12 170.32,-0.12 170.32,67.12 92.08,67.12 92.06,67.14 92.04,67.16 92.02,67.18 92.02,111.12 67.98,111.12 67.98,110.28 67.96,110.26 67.94,110.24 67.92,110.22 20.68,110.22 20.66,110.24 20.64,110.26 20.62,110.28 20.62,111.12 0.08,111.12 0.08,59.18 6.32,59.18 6.34,59.16 6.36,59.14 6.38,59.12 6.38,40.98 6.36,40.96 6.34,40.94 6.32,40.92 0.08,40.92 0.08,0.08 75.12,0.08 75.12,10.12 75.14,10.14 75.16,10.16 75.18,10.18 93.52,10.18 93.54,10.16
GPIO8
  Top 0.127: R1.1 19.19,38.93 19.19,41.34 U2.10
INT_RTC  (via drill 0.3)
  Top 0.127: 86.25,56.07 86.25,57.34 88.02,59.12 88.02,59.38 U3.3 | 86.25,56.07 86.25,49.09 88.15,47.18 88.15,46.93 R1_PINH1.1 | 86.25,56.07 31,56.07 16.65,41.72 16.65,41.47 U2.8 16.65,41.34 16.65,41.09 v18.43,39.31 | v41.41,16.32 41.41,2.86 INT_RTC.TP
  Bottom 0.127: v18.43,39.31 v41.41,16.32
IO/BOOT
  Top 0.127: R_BOOT.2 53.35,109.29 50.94,109.29 50.81,109.41 BOOT_BUTTON.3 50.69,109.54 47.38,109.54 BOOT_BUTTON.4 47.26,109.41 47.13,109.29 44.59,109.29 C6.1 44.46,109.16 43.57,109.16 42.43,108.02 42.43,88.84 24.27,70.68 24.27,58.99 U2.15
IO/CHANGE  (via drill 0.3)
  Top 0.127: R_CHANGE.2 67.96,109.29 65.93,109.29 65.8,109.41 CHANGE_BUTTON.3 65.67,109.54 62.37,109.54 CHANGE_BUTTON.4 62.24,109.41 61.99,109.16 59.83,109.16 C10.1 59.7,109.03 v58.94,108.27 | v14.11,60.52 14.11,58.99 U2.23
  Bottom 0.127: v14.11,60.52 14.11,63.44 v58.94,108.27
MISO  (via drill 0.3)
  Top 0.127: v12.21,98.49 11.95,98.75 11.44,98.75 R8.1 | D12.1 13.73,97.35 13.6,97.48 v12.84,97.48 8.01,92.65 | 8.01,92.65 5.98,92.65 J4.P7 | v32.65,52.01 34.18,52.01 U1.2 | v15.63,52.01 9.03,58.61 9.03,58.87 U2.27 | v10.55,46.93 7,43.37 7,41.21 3.06,37.28 3.06,28.39 MISO.TP | v8.01,76.52 8.01,92.65
  Bottom 0.127: v12.21,98.49 12.21,98.11 v12.84,97.48 | v15.63,52.01 v32.65,52.01 | v15.63,52.01 v10.55,46.93 | v8.01,76.52 8.01,59.63 v15.63,52.01
MOSI  (via drill 0.3)
  Top 0.127: v83.58,15.81 83.58,14.67 J1.14 | 42.3,33.59 v43.07,32.83 | v42.05,38.29 42.05,49.34 U1.5 | 42.3,33.59 D11.1 | 42.3,33.59 R7.1 | v16.65,39.82 15.38,41.09 15.38,41.34 U2.7 | v7,87.82 6.74,88.08 5.98,88.08 J4.P3 | v88.15,83 88.15,85.41 MOSI.TP
  Bottom 0.127: v83.58,15.81 83.32,15.81 72.4,26.74 | 72.4,26.74 66.31,32.83 v43.07,32.83 42.05,33.85 v42.05,38.29 40.53,39.82 v16.65,39.82 13.35,43.12 11.06,43.12 7,47.18 v7,87.82 | v88.15,83 88.15,76.27 88.79,75.63 88.79,49.34 87.52,48.07 87.52,41.85 72.4,26.74
N$1
  Top 0.127: C1_BAT1.1 124.6,39.31 124.6,41.85 D2.1 124.6,41.98 127.14,41.98 | 127.14,41.98 127.78,41.98 IC4.3 | 127.14,41.98 127.14,43.37 127.52,43.75 127.78,43.75 IC4.1 127.9,43.88 128.54,44.52 135.52,44.52 139.46,48.45 140.22,48.45 Q1.2
N$2
  Top 0.127: R2-USB.1 151.4,50.99 153.56,50.99 158.38,55.82 163.59,55.82 J2.B5
N$3
  Top 0.127: R2-USB1.2 159.65,53.03 163.59,53.03 J2.A5
N$4
  Top 0.127: C_DELAY.1 52.21,102.43 50.69,102.43 50.56,102.56 IC1.5
N$5
  Top 0.127: C4.1 96.02,34.61 93.87,34.61 93.36,34.1 D4.1 93.23,33.98 92.72,33.47 89.04,33.47 87.01,35.5 83.07,35.5 81.29,37.28 79.9,37.28 D3.2
N$6
  Top 0.127: R1_BAT.2 129.55,51.5 130.06,51.5 130.7,52.14 133.36,52.14 133.74,51.76 134,51.76 MCP73831.1
N$7
  Top 0.127: CHG_LED.C 128.03,53.53 128.03,51.63 128.16,51.5 R1_BAT.1
N$8
  Top 0.127: R2_BAT.2 132.35,49.34 132.35,50.87 131.59,51.63 MCP73831.5
N$9
  Top 0.127: J1.24 78.5,14.67 78.5,18.23 78.37,18.35 EPC_C12.2
N$10
  Top 0.127: R_CAPACITOR.1 94.25,61.15 91.83,61.15 89.42,63.57 88.41,63.57 88.28,63.69 D7.1
N$11
  Top 0.127: J1.22 79.64,14.67 79.64,16.58 81.42,18.35 EPC_C10.2
N$13
  Top 0.127: J1.20 80.66,14.67 80.66,15.05 83.32,17.72 83.83,17.72 84.34,18.23 EPC_C8.2
N$14
  Top 0.127: J1.19 81.17,14.67 81.17,15.18 83.45,17.47 85.23,17.47 85.99,18.23 EPC_C7.2
N$15  (via drill 0.3)
  Top 0.127: v81.67,13.91 81.67,14.54 J1.18 | v87.39,17.59 87.39,18.1 87.52,18.23 EPC_C6.2
  Bottom 0.127: v81.67,13.91 82.44,13.91 83.58,15.05 84.85,15.05 v87.39,17.59
N$24
  Top 0.127: J1.5 88.02,14.54 88.02,14.16 86.12,12.26 78.88,12.26 77.36,13.78 63.26,13.78 62.62,14.42 EPC_C2.2
N$25  (via drill 0.3)
  Top 0.127: v89.04,12.77 90.56,14.29 90.56,15.05 90.31,15.31 88.91,15.31 88.66,15.05 88.66,14.67 J1.4 | v82.31,12.77 78.75,12.77 77.1,14.42 64.15,14.42 EPD_C1.2
  Bottom 0.127: v82.31,12.77 v89.04,12.77
PREVGH
  Top 0.127: J1.21 80.15,14.67 80.15,15.43 82.94,18.23 EPC_C9.2 83.07,18.35 83.71,18.99 83.71,20.01 89.8,26.1 89.8,29.91 D5.1
PREVGL
  Top 0.127: J1.23 79.13,14.67 79.13,17.72 79.77,18.35 EPC_C11.2 79.77,18.48 79.13,19.12 79.13,26.23 77.99,27.37 77.99,37 79.13,38.14 84.74,38.14 88.79,34.1 89.8,34.1 D4.2
RESE
  Top 0.127: J1.3 89.04,14.54 89.04,14.16 86.88,12.01 78.75,12.01 77.99,12.77 64.4,12.77 63.64,12.01 R3.2 63.51,12.01 62.88,12.64 61.86,12.64 61.61,12.39 60.21,12.39 Q3.2
RESET  (via drill 0.3)
  Top 0.127: C5.1 20.08,109.41 22.24,109.41 RESET_BUTTON.4 22.37,109.54 25.67,109.54 RESET_BUTTON.3 25.79,109.41 26.05,109.16 28.46,109.16 R_RESET.2 28.59,109.03 v39.76,109.03 | v46.11,102.68 47.64,102.68 IC1.1 | v10.17,44.64 10.17,41.47 U2.3
  Bottom 0.127: v46.11,102.68 v39.76,109.03 7.51,76.78 7.51,48.07 10.17,45.41 v10.17,44.64
RTC_RST
  Top 0.127: U2.16 23,58.87 23,58.61 23.76,57.85 85.48,57.85 86.75,59.12 86.75,59.38 U3.4
RX  (via drill 0.3)
  Top 0.127: v41.92,88.97 12.84,59.88 12.84,58.99 U2.24 | v82.44,101.92 83.45,102.94 RX.TP
  Bottom 0.127: v41.92,88.97 69.48,88.97 v82.44,101.92
SRC  (via drill 0.3)
  Top 0.127: C4.2 96.02,33.34 96.02,32.58 93.48,30.04 D5.2 93.36,30.04 91.45,30.04 86.75,34.74 82.27,34.74 | v73.42,26.48 72.28,26.48 60.34,14.54 59.58,14.54 Q3.3 | 82.27,34.74 v81.09,33.56 | 82.27,34.74 L1.1
  Bottom 0.127: v81.09,33.56 74.02,26.48 v73.42,26.48
SS_SD
  Top 0.127: R10.1 32.91,43.75 34.3,43.75 D8.1 34.43,43.63 40.78,37.28 40.78,33.09 40.53,32.83 14.87,32.83 13.09,31.05 12.7,31.05 11.57,32.17 11.57,41.37 U2.4 11.44,41.47 11.06,41.85 11.06,47.06 7,51.12 7,86.3 6.36,86.94 J4.P2
TX  (via drill 0.3)
  Top 0.127: v40.78,88.46 11.57,59.25 11.57,58.99 U2.25 | v87.52,101.92 88.53,102.94 TX.TP
  Bottom 0.127: v40.78,88.46 74.05,88.46 v87.52,101.92
VRTC
  Top 0.127: 94.37,51.12 95.26,51.12 95.9,51.76 C10_SUPERCAP.1 | 94.37,51.12 93.1,51.12 C8.1 92.98,51.12 92.72,51.38 88.91,51.38 88.15,50.61 88.15,50.23 U3.14 | 94.37,51.12 94.37,59.76 R_CAPACITOR.2